# Altium PCB Copy of keybo.PcbDoc
Units mil, origin at the board's own origin, x right, y up, seen from the top; angles counter-clockwise.
Board outline 6000 x 4000 mil, 2 copper layers (Top Layer, Bottom Layer); 77 components, 39 nets, 367 pads, 162 vias.
Unrouted connection lines stored in the file: 3.
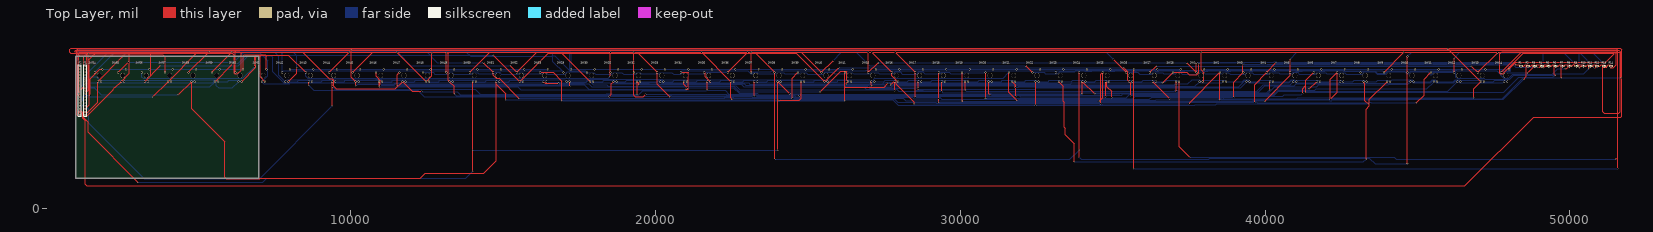
[diagram p0: Top Layer view]
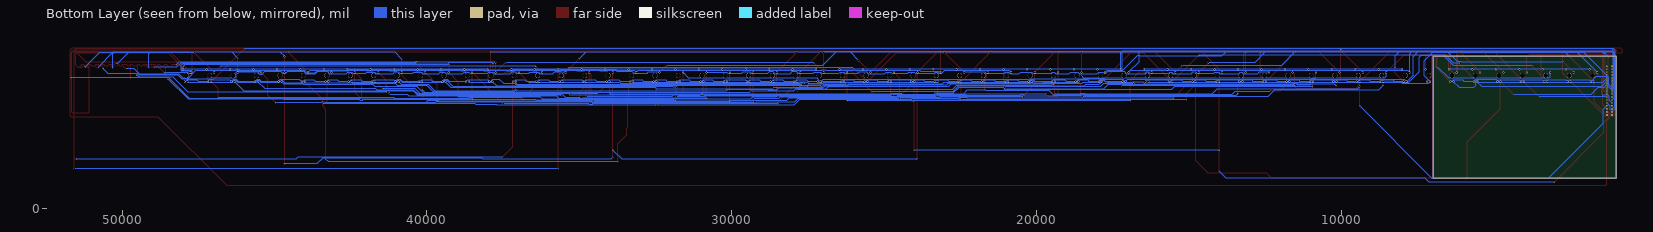
[diagram p1: Bottom Layer view, seen from below]

## Layer stack, top to bottom
Top Solder: solder mask 0.4, Solder Resist, Dk 3.5
Top Layer: signal copper 1.4
Dielectric 1: dielectric 12.6, FR-4, Dk 4.8
Bottom Layer: signal copper 1.4
Bottom Solder: solder mask 0.4, Solder Resist, Dk 3.5

## Board outline
1000,1000 7000,1000 7000,5000 1000,5000

## Design rules (kind name [scope] priority, off if disabled: settings)
Clearance [All] p1: gap=10 ignorepadtopadclearanceinfootprint=FALSE except(0: Arc-Hole Track-Hole SMDPad-Hole THPad-Hole Via-Hole Fill-Hole Poly-Hole Region-Hole Text-Hole)
PolygonConnect [All] p1: connectstyle=Relief reliefconductorwidth=10 reliefentries=4 polygonreliefangle="90 Angle" airgapwidth=10
RoutingVias [All] p1: holewidth=28 width=50 viastyle="Through Hole" minholewidth=28 minwidth=50 maxholewidth=28 maxwidth=50
SolderMaskExpansion [All] p1: expansion=4
Width [All] p1: maxlimit=10 minlimit=10 preferedwidth=10
30 further rules are at their usual default settings.

## Components (designator, comment, footprint, x,y, rotation, side; value= is the part's Value field where it differs from the comment)
P1 "Header 17" HDR1X17 1300,3075 r90 top
P2 "Header 17" HDR1X17 1130,3075 r90 top
R1 "Res" R2012 48395,4680 r0 top
R2 "Res" R2012 48620,4680 r0 top
R3 "Res" R2012 48845,4680 r0 top
R4 "Res" R2012 49075,4680 r0 top
R5 "Res" R2012 49300,4680 r0 top
R6 "Res" R2012 49530,4680 r0 top
R7 "Res" R2012 49755,4680 r0 top
R8 "Res" R2012 49985,4680 r0 top
R9 "Res" R2012 50210,4680 r0 top
R10 "Res" R2012 50440,4680 r0 top
R11 "Res" R2012 50665,4680 r0 top
R12 "Res" R2012 50890,4680 r0 top
R13 "Res" R2012 51120,4680 r0 top
R14 "Res" R2012 51345,4680 r0 top
SW1 "MX_SW" MX_SW-2 37900,4370 r0 top
SW2 "MX_SW" MX_SW-2 38670,4370 r0 top
SW3 "MX_SW" MX_SW-2 39440,4370 r0 top
SW4 "MX_SW" MX_SW-2 40205,4370 r0 top
SW5 "MX_SW" MX_SW-2 40975,4370 r0 top
SW6 "MX_SW" MX_SW-2 41745,4370 r0 top
SW7 "MX_SW" MX_SW-2 42515,4370 r0 top
SW8 "MX_SW" MX_SW-2 43280,4370 r0 top
SW9 "MX_SW" MX_SW-2 44050,4370 r0 top
SW10 "MX_SW" MX_SW-2 44820,4370 r0 top
SW11 "MX_SW" MX_SW-2 45590,4370 r0 top
SW12 "MX_SW" MX_SW-2 46355,4370 r0 top
SW13 "MX_SW" MX_SW-2 47125,4370 r0 top
SW14 "MX_SW" MX_SW-2 47895,4370 r0 top
SW15 "MX_SW" MX_SW-2 27135,4370 r0 top
SW16 "MX_SW" MX_SW-2 27905,4370 r0 top
SW17 "MX_SW" MX_SW-2 28675,4370 r0 top
SW18 "MX_SW" MX_SW-2 29445,4370 r0 top
SW19 "MX_SW" MX_SW-2 30210,4370 r0 top
SW20 "MX_SW" MX_SW-2 30980,4370 r0 top
SW21 "MX_SW" MX_SW-2 31750,4370 r0 top
SW22 "MX_SW" MX_SW-2 32520,4370 r0 top
SW23 "MX_SW" MX_SW-2 33285,4370 r0 top
SW24 "MX_SW" MX_SW-2 34055,4370 r0 top
SW25 "MX_SW" MX_SW-2 34825,4370 r0 top
SW26 "MX_SW" MX_SW-2 35595,4370 r0 top
SW27 "MX_SW" MX_SW-2 36365,4370 r0 top
SW28 "MX_SW" MX_SW-2 37130,4370 r0 top
SW29 "MX_SW" MX_SW-2 17140,4370 r0 top
SW30 "MX_SW" MX_SW-2 17910,4370 r0 top
SW31 "MX_SW" MX_SW-2 18680,4370 r0 top
SW32 "MX_SW" MX_SW-2 19450,4370 r0 top
SW33 "MX_SW" MX_SW-2 20215,4370 r0 top
SW34 "MX_SW" MX_SW-2 20985,4370 r0 top
SW35 "MX_SW" MX_SW-2 21755,4370 r0 top
SW36 "MX_SW" MX_SW-2 22525,4370 r0 top
SW37 "MX_SW" MX_SW-2 23295,4370 r0 top
SW38 "MX_SW" MX_SW-2 24060,4370 r0 top
SW39 "MX_SW" MX_SW-2 24830,4370 r0 top
SW40 "MX_SW" MX_SW-2 25600,4370 r0 top
SW41 "MX_SW" MX_SW-2 26370,4370 r0 top
SW42 "MX_SW" MX_SW-2 7915,4370 r0 top
SW43 "MX_SW" MX_SW-2 8685,4370 r0 top
SW44 "MX_SW" MX_SW-2 9455,4370 r0 top
SW45 "MX_SW" MX_SW-2 10220,4370 r0 top
SW46 "MX_SW" MX_SW-2 10990,4370 r0 top
SW47 "MX_SW" MX_SW-2 11760,4370 r0 top
SW48 "MX_SW" MX_SW-2 12530,4370 r0 top
SW49 "MX_SW" MX_SW-2 13300,4370 r0 top
SW50 "MX_SW" MX_SW-2 14065,4370 r0 top
SW51 "MX_SW" MX_SW-2 14835,4370 r0 top
SW52 "MX_SW" MX_SW-2 15605,4370 r0 top
SW53 "MX_SW" MX_SW-2 16375,4370 r0 top
SW54 "MX_SW" MX_SW-2 1765,4370 r0 top
SW55 "MX_SW" MX_SW-2 2535,4370 r0 top
SW56 "MX_SW" MX_SW-2 3305,4370 r0 top
SW57 "MX_SW" MX_SW-2 4070,4370 r0 top
SW58 "MX_SW" MX_SW-2 4840,4370 r0 top
SW59 "MX_SW" MX_SW-2 5610,4370 r0 top
SW60 "MX_SW" MX_SW-2 6380,4370 r0 top
SW61 "MX_SW" MX_SW-2 7145,4370 r0 top

## Footprints (in the part's own frame and the unit in brackets; to place one, negate y for a bottom-side part, rotate by r counter-clockwise, add the part's x,y. Pads: shape width x height; smd on the part's side, far side on the other; paste and mask are expansions set on the pad)
HDR1X17 [mm] "Connector; Header; 17 Position"
  rect 1.5x1.5 hole 0.9: 1(0,0)
  round 1.5 hole 0.9: 2(2.54,0) 3(5.08,0) 4(7.62,0) 5(10.16,0) 6(12.7,0) 7(15.24,0) 8(17.78,0) 9(20.32,0) 10(22.86,0) 11(25.4,0) 12(27.94,0) 13(30.48,0) 14(33.02,0) 15(35.56,0) 16(38.1,0) 17(40.64,0)
  silkscreen extent -1.27,-1.27 41.91,1.27, body extent -1.27,-1.27 41.91,1.27, height 7.58
MX_SW-2 [mm] "without Fixation pins  1-Pole w/LED"
  round 1.5 hole 0.9: 1(-3.81,2.54) 2(2.54,5.08) 3(-1.27,-5.08) 4(1.27,-5.08)
  round 4.064 hole 4.064: ""(0,0)
R2012 [mm] "Chip Resistor, 2-Leads, Body 2.0x1.2mm, IPC Low Density"
  rect 1x1.4 smd: 1(-1.2,0) 2(1.2,0)
  silkscreen extent -0.3,-0.6 0.3,0.6, body extent -0.98,-0.6 1.02,0.6, height 0.5

## Part data
P1 P2: "Header, 17-Pin", LatestRevisionDate=17-Jul-2002, LatestRevisionNote="Re-released for DXP Platform.", Publisher="Altium Limited"
R1 R2 R3 R4 R5 R6 R7 R8 R9 R10 R11 R12 R13 R14: "贴片电阻"
SW1 SW2 SW3 SW4 SW5 SW6 SW7 SW8 SW9 SW10 SW11 SW12 SW13 SW14 SW15 SW16 SW17 SW18 SW19 SW20 SW21 SW22 SW23 SW24 SW25 SW26 SW27 SW28 SW29 SW30 SW31 SW32 SW33 SW34 SW35 SW36 SW37 SW38 SW39 SW40 SW41 SW42 SW43 SW44 SW45 SW46 SW47 SW48 SW49 SW50 SW51 SW52 SW53 SW54 SW55 SW56 SW57 SW58 SW59 SW60 SW61: library part MX_SW-2, "without Fixation pins  1-Pole w/LED"

## Via types
v1: diameter 50, hole 28, Top Layer to Bottom Layer, 162 vias

## Nets (pads, with @x,y where several pads share a name; then routed paths per layer and width w, separated by ;. In a path a pad name is that pad's centre, name@x,y a point inside that pad or via, vN(x,y) a via of type N, cw(c..) or ccw(c..) an arc to the next point about the centre after c; other vN are vias at no path point)
GND: P1.17
kcol1: P1.1 SW1.3 SW15.3 SW29.3 SW42.3 SW54.3 | length 38917.7
  Top Layer w10: P1.1 1663.72,3438.72 1715,3490 SW54.3 v1(2525,4980) ; SW15.3 27085,4050 v1(27105,4030)
  Bottom Layer w10: v1(2525,4980) 2670,5125 7513,5125 7658,4980 7658,4377 SW42.3 7930,4235 10835.94,4235 10855.47,4254.53 11005,4254.53 11024.53,4235 14082,4235 14085,4238 17022,4238 SW29.3 17157,4237 17751.42,4237 17768.95,4254.53 20249.53,4254.53 20269.06,4235 27020,4235 SW15.3 ; v1(27105,4030) 27495,4030 27539,3986 27746,3986 27787,4027 37038.92,4027 37046.38,4019.53 37699.53,4019.53 SW1.3
kcol2: P1.2 SW2.3 SW16.3 SW30.3 SW55.3 | length 40071.7
  Top Layer w10: P1.2 1255.47,3130.47 1255.47,3030 1345,3030 2216,3901 2216,3920 2272.47,3976.47 2291.47,3976.47 SW55.3 2753,4438 2753,5080 2798,5125 16905,5125 SW30.3 ; v1(27727,4074) 27823,4170 SW16.3 v1(27855,3874)
  Bottom Layer w10: SW30.3 17961,4069 18405,4069 18451,4023 19488,4023 19500,4035 22635,4035 22776,3894 27835,3894 v1(27855,3874) ; v1(27727,4074) 37020.38,4074 37046.38,4100 37470,4100 37607,4237 37860,4237 37896,4201 37896,4139 37910,4125 38575,4125 SW2.3
kcol3: P1.3 SW3.3 SW17.3 SW31.3 SW43.3 SW56.3 | length 43356
  Top Layer w10: P1.3 1435,3410 1435,4900 1660,5125 3405,5125 3450,5080 3450,4365 SW56.3 v1(3769,4684) ; v1(8635,4057) SW43.3 ; v1(18493,3680) 18562,3749 18562,4102 SW31.3 ; v1(28625,3925) SW17.3 v1(28625,3964)
  Bottom Layer w10: v1(3769,4684) 6328,4684 6654,5010 7402,5010 7452,4960 7452,4493.47 7820,4125.47 7988.47,4125.47 8010,4147 8612,4147 SW43.3 ; v1(8635,4057) 8804,3888 12214,3888 12422,3680 v1(18493,3680) ; SW31.3 18675,4125 19808,4125 19832,4149 20069.47,4149 20135,4214.53 20194.47,4214.53 20209,4200 20209,4183 20220,4172 20220,4145.47 20240,4125.47 20903.53,4125.47 20904,4125 23060,4125 23105,4080 26181.29,4080 26218.1,4043.19 27001.81,4043.19 27081,3964 v1(28625,3964) ; v1(28625,3925) 32457,3925 32495,3963 34867,3963 34878,3974 39194,3974 SW3.3
kcol4: P1.4 SW4.3 SW18.3 SW32.3 SW44.3 | length 43729.7
  Top Layer w10: v1(9405,3375) SW44.3 v1(9405,4009) ; v1(19400,3754) SW32.3 19460,4110 v1(19460,4063) ; v1(40155,3906) SW4.3 ; v1(29395,3848) SW18.3 v1(29395,3848)
  Bottom Layer w10: P1.4 1417,3258 1417,2804 3231,990 7020,990 v1(9405,3375) ; v1(9405,4009) 9492,3922 14089,3922 14257,3754 18394.31,3754 18411.57,3771.26 18569.72,3771.26 18586.98,3754 v1(19400,3754) ; v1(19460,4063) 19477,4080 22823,4080 22906,3997 26833,3997 26911,3919 27916,3919 27987,3848 v1(29395,3848) 29433.69,3809.31 34558.69,3809.31 34560,3808 37051.89,3808 37052.89,3807 37131.89,3807 37132.89,3808 40057,3808 v1(40155,3906)
  other v1: 29395,3848
kcol5: P1.5 SW5.3 SW19.3 SW33.3 SW45.3 | length 44503.7
  Top Layer w10: v1(10025,5207) 10025,4315 SW45.3 v1(10170,4027) ; v1(30160,3881) SW19.3 v1(30160,3881)
  Bottom Layer w10: P1.5 1184,3359 1184,3254 1160,3230 1075,3230 1025,3280 1025,5200 1075,5250 9982,5250 v1(10025,5207) ; v1(10170,4027) 10233,4090 11445.67,4090 11468.88,4113.2 11588.88,4113.2 11612.08,4090 16447,4090 16505.34,4148.34 16864.68,4148.34 16888.02,4125 17235,4125 17243,4133 17677,4133 17685,4141 17741.47,4141 17815,4214.53 17893,4214.53 17905,4202.53 17905,4160 17940,4125 18501,4125 18521,4105 20100,4105 SW33.3 20229.53,4105.47 20707.53,4105.47 20710,4103 22916,4103 22970,4049 26174.19,4049 26200,4023.19 26957.81,4023.19 27037,3944 28484,3944 28543,3885 28784,3885 28793,3894 30147,3894 v1(30160,3881) 30194,3847 37012.72,3847 37052.89,3887.17 37132.89,3887.17 37163.05,3857 39723,3857 39933,4067 40822,4067 SW5.3
  other v1: 30160,3881
kcol6: P1.6 SW6.3 SW20.3 SW34.3 SW46.3 | length 32727.5
  Top Layer w10: v1(10940,4006) SW46.3 ; v1(41454,3929) SW6.3 ; 20935,4088 SW34.3 20935,4088 ; 20935,4088 v1(21048,3975) 20935,4088 ; 30930,3776 SW20.3 30930,3776 ; 30930,3776 v1(30970,3736) 30930,3776
  Bottom Layer w10: v1(10940,4006) 15484,4006 15586,3904 20956,3904 20976,3884 21020,3884 21048,3912 v1(21048,3975) 22561.5,3975 22756.5,3780 23335.9,3780 23381.9,3734 24687,3734 24702,3749 24766.81,3749 24781.81,3734 30968,3734 v1(30970,3736) 31962.26,3736 31969.26,3729 35301,3729 35339,3767 40213,3767 40375,3929 v1(41454,3929)
  other v1: 30970,3736 21048,3975
kcol7: P1.7 SW7.3 SW21.3 SW35.3 SW47.3 SW57.3 | length 44476.6
  Top Layer w10: v1(3525,3675) SW57.3 4975,5125 8437,5125 9301,4261 9400,4261 9455,4206 9455,4012 9533,3934 11474,3934 SW47.3 12034,3846 v1(12334,3846) ; v1(31810,3982) 31810,4060 ; v1(31820,3674) 31820,4050 31810,4050 31810,4060 ; 31810,4060 SW21.3 31810,4060 ; v1(21705,3897) SW35.3 v1(21705,3897)
  Bottom Layer w10: P1.7 v1(3525,3675) ; v1(12334,3846) 12338,3842 13501,3842 13609,3734 18414,3734 18422.63,3742.63 18549,3742.63 18577.63,3714 19440,3714 19590,3864 21672,3864 v1(21705,3897) 21724,3878 22292,3878 22410,3760 23295,3760 23357.28,3697.72 24572.11,3697.72 24601.27,3668.56 24766.81,3668.56 24791.25,3693 30876.29,3693 30895.29,3674 v1(31820,3674) ; v1(31810,3982) 31910,3982 31924,3996 34776,3996 34781,4001 37024.92,4001 37026.38,3999.53 39131,3999.53 39346,4214.53 39417.47,4214.53 39445,4187 39445,4140 39460,4125 40354,4125 40368,4139 40792,4139 40798,4145 40810.94,4145 40880.47,4214.53 40954.47,4214.53 40969,4200 40969,4183 40980,4172 40980,4145 41000,4125 42420,4125 SW7.3
  other v1: 21705,3897
kcol8: P1.8 SW8.3 SW22.3 SW36.3 SW48.3 | length 47961.6
  Top Layer w10: P1.8 1407,3882 v1(1407,5077) ; v1(11525,5125) SW48.3 12675,4365 v1(12675,5099) ; v1(21520,5125) SW36.3 22475,3638 v1(22515,3598) ; v1(32470,3391) SW22.3 v1(32470,3398) ; SW8.3 43230,4132 43272,4090 43272,3547 v1(43381,3438)
  Bottom Layer w10: v1(1407,5077) 1455,5125 v1(11525,5125) ; v1(12675,5099) 12701,5125 v1(21520,5125) ; v1(22515,3598) 22520.27,3603.27 24090,3603.27 24117.27,3576 25850.22,3576 25851.51,3577.29 27795.71,3577.29 27975,3398 v1(32470,3398) ; v1(32470,3391) 34547.65,3391 34551.08,3387.57 34667.65,3387.57 34673.08,3393 37693,3393 37714,3414 38388,3414 38412,3438 v1(43381,3438)
kcol9: P1.9 SW9.3 SW23.3 SW37.3 SW49.3 | length 50247.6
  Top Layer w10: P1.9 1345,3920 1345,5080 1390,5125 13160,5125 13205,5080 13205,4215 SW49.3 13402,4018 v1(13402,3764) ; v1(23245,3700) SW37.3 ; SW23.3 33380,4025 33380,3522 33413,3489 33413,2667 33447,2633 33447,2434 33748,2133 v1(33748,1537) ; v1(43310,1620) 43310,3264 43421,3375 43421,3591 SW9.3
  Bottom Layer w10: v1(13402,3764) 13466,3700 18421.35,3700 18443.98,3722.63 18514.78,3722.63 18543.41,3694 20390.87,3694 20421.84,3724.97 20516.87,3724.97 20541.84,3700 v1(23245,3700) ; SW37.3 23290,4125 27000.94,4125 27020.47,4105.47 27460.74,4105.47 27490,4134.74 27550.74,4134.74 27570,4154 27787,4154 27816,4125 33190,4125 SW23.3 ; v1(33748,1537) 43227,1537 v1(43310,1620)
kcol10: P1.10 SW10.3 SW24.3 SW38.3 SW50.3 | length 54105.7
  Top Layer w10: P1.10 1255.47,3930.47 1255.47,3159.53 1235.47,3139.53 1235.47,2995.15 1398,2832.62 1398,2508 v1(3031,875) ; v1(14015,1230) SW50.3 v1(14015,1925) ; v1(24010,1925) SW38.3 v1(24404,3776) ; v1(34005,3769) SW24.3 v1(34406,3769)
  Bottom Layer w10: v1(3031,875) 7125,875 7250,1000 13785,1000 v1(14015,1230) ; v1(14015,1925) v1(24010,1925) ; v1(24404,3776) 24772.81,3776 24786.81,3762 30932,3762 30946,3776 30994,3776 31010,3760 33996,3760 v1(34005,3769) ; v1(34406,3769) 35225,3769 35244,3788 37033,3788 37034,3787 37152.89,3787 37153.89,3788 40103,3788 40310,3995 41700,3995 41767,4062 44046,4062 44060,4076 44676,4076 SW10.3
kcol11: P1.11 SW11.3 SW25.3 SW39.3 SW51.3 SW58.3 | length 52604.8
  Top Layer w10: v1(4353,3733) SW58.3 4790,3280 5877,2193 5877,1033 5920,990 7020,990 7030,1000 12285,1000 12449,1164 14381,1164 14785,1568 SW51.3 14785,4086 15098,3773 v1(15098,3577) ; v1(24050,3563) 24720,3563 24780,3623 SW39.3 24780,3762 v1(24727,3709) ; v1(34775,3679) SW25.3 34808,4137 34808,4005 34965,3848 v1(34965,3645)
  Bottom Layer w10: P1.11 1402,3973 1594,3973 1834,3733 v1(4353,3733) ; v1(15098,3577) 17107,3577 17110,3574 22449,3574 22465,3558 24045,3558 v1(24050,3563) ; v1(24727,3709) 24732,3714 30895,3714 30915,3694 31039,3694 31050,3705 31739,3705 31748,3714 31931,3714 31966,3679 v1(34775,3679) ; v1(34965,3645) 35452,3645 35554,3747 40282,3747 40423.54,3888.54 41625.99,3888.54 41675.45,3938 45308,3938 SW11.3
kcol12: P1.12 SW12.3 SW26.3 SW40.3 SW52.3 SW59.3 | length 47853.6
  Top Layer w10: SW59.3 6105,4715 v1(6105,4772) ; v1(14688,5037) SW52.3 16490,5105 24615,5105 SW40.3 v1(26011,4631) ; v1(35368,4625) 35500,4493 35500,4215 SW26.3 35594,4121 v1(35594,3705)
  Bottom Layer w10: P1.12 1482,3993 5383,3993 SW59.3 ; v1(6105,4772) 6320,4772 6585,5037 v1(14688,5037) ; v1(26011,4631) 31940,4631 31946,4625 v1(35368,4625) ; v1(35594,3705) 35614,3725 40307,3725 40439,3857 45992,3857 SW12.3
kcol13: P1.13 SW13.3 SW27.3 SW60.3 | length 65036
  Top Layer w10: SW27.3 v1(36873,3612) ; v1(45995,5250) 46680.25,4564.75 SW13.3 46847,3942 v1(46847,3644)
  Bottom Layer w10: SW60.3 6131,3971 5676,3971 5607,4040 5607,4187.53 5580,4214.53 5540,4214.53 5515.47,4190 5515.47,4162 5478.47,4125 1450,4125 P1.13 1255.47,4230.47 1255.47,4020.47 1160,3925 1100,3925 1085,3940 1085,5200 1135,5250 v1(45995,5250) ; v1(36873,3612) 36893,3632 38618,3632 38638,3612 41044,3612 41076,3644 v1(46847,3644)
kcol14: P1.14 SW14.3 SW28.3 SW41.3 SW53.3 SW61.3 | length 49796
  Top Layer w10: SW53.3 16387,4108 v1(16825,4108) ; v1(25402,3837) 26080,4515 26258,4515 26275,4498 26275,4215 SW41.3 26260,4110 v1(26260,4084) ; v1(37086,4060) 37080,4066 SW28.3 37080,4052 37093,4039 v1(37093,3847)
  Bottom Layer w10: P1.14 2045,5120 7020,5120 7290,4850 7290,4365 SW61.3 7159.53,4105.47 8010,4105.47 8029.53,4125 11440.67,4125 11448.88,4133.2 11600.67,4133.2 11608.88,4125 16280,4125 SW53.3 ; v1(16825,4108) 16837,4096 17816,4096 17914,3998 21002,3998 21019,4015 22570,4015 22748,3837 v1(25402,3837) ; v1(26260,4084) 27417,4084 27424,4077 27488,4077 27531,4034 27750,4034 27767,4051 37077,4051 v1(37086,4060) ; v1(37093,3847) 37105,3835 39790,3835 39982,4027 40951,4027 41019,4095 42452,4095 42473,4116 44646,4116 44744.53,4214.53 44797.47,4214.53 44820,4192 44820,4145 44840,4125 45428,4125 45517.53,4214.53 45560,4214.53 45590,4184.53 45590,4155 45620,4125 46180,4125 46269.53,4214.53 46332.47,4214.53 46355,4192 46355,4148 46378,4125 47800,4125 SW14.3
krow1: P2.1 SW1.2 SW2.2 SW3.2 SW4.2 SW5.2 SW6.2 SW7.2 SW8.2 SW9.2 SW10.2 SW11.2 SW12.2 SW13.2 SW14.2 | length 192492.4
  Top Layer w10: P2.1 1085,3120 1085,3200 1105,3220 1160,3220 1215.47,3164.53 1215.47,2975.41 1303,2887.88 1303,800 1353,750 46555,750 48805,3000 51663.58,3000 51703.58,3040 51703.58,5206.42 51640,5270 840,5270 800,5230 800,5130 825,5105 6120.47,5105 6185.47,5040 6185.47,4440 6200,4425.47 6293.5,4425.47 6412,4543.97 6412,5093 6360,5145 960,5145 960,5150 1000,5190 51511.08,5190 51556.08,5145 47770,5145 47700.47,5075.47 47700.47,4440 47715,4425.47 47789.53,4425.47 48469.06,5105 51440,5105 51450,5095 51450,5075 51171,4796 48221,4796 SW14.2
  Bottom Layer w10: SW1.2 38385,4570 SW2.2 39155,4570 SW3.2 39922,4570 SW4.2 40690,4570 SW5.2 41460,4570 SW6.2 42230,4570 SW7.2 42997,4570 SW8.2 43765,4570 SW9.2 44535,4570 SW10.2 45305,4570 SW11.2 46072,4570 SW12.2 46840,4570 SW13.2 47610,4570 SW14.2
krow2: P2.2 SW15.2 SW16.2 SW17.2 SW18.2 SW19.2 SW20.2 SW21.2 SW22.2 SW23.2 SW24.2 SW25.2 SW26.2 SW27.2 SW28.2 | length 86038.8
  Top Layer w10: P2.2 1175,3130 1175,3030 1075,3030 1025,3080 1025,5200 1075,5250 51509,5250 51559,5200 v1(51559,1310) ; v1(35695,1310) SW26.2
  Bottom Layer w10: SW15.2 27620,4570 SW16.2 28390,4570 SW17.2 29160,4570 SW18.2 29927,4570 SW19.2 30695,4570 SW20.2 31465,4570 SW21.2 32235,4570 SW22.2 33002,4570 SW23.2 33770,4570 SW24.2 34540,4570 SW25.2 35310,4570 SW26.2 36080,4570 SW27.2 36847,4570 SW28.2 ; v1(35695,1310) v1(51559,1310)
krow3: P2.3 SW29.2 SW30.2 SW31.2 SW32.2 SW33.2 SW34.2 SW35.2 SW36.2 SW37.2 SW38.2 SW39.2 SW40.2 SW41.2 | length 27888.3
  Bottom Layer w10: P2.3 1045,3360 1045,5120 1085,5160 17200,5160 17240,5120 SW29.2 17625,4570 SW30.2 18395,4570 SW31.2 19165,4570 SW32.2 19932,4570 SW33.2 SW34.2 21470,4570 SW35.2 22240,4570 SW36.2 23010,4570 SW37.2 23777,4570 SW38.2 24545,4570 SW39.2 25315,4570 SW40.2 26085,4570 SW41.2
krow4: P2.4 SW42.2 SW43.2 SW44.2 SW45.2 SW46.2 SW47.2 SW48.2 SW49.2 SW50.2 SW51.2 SW52.2 SW53.2 | length 8460
  Bottom Layer w10: SW42.2 8400,4570 SW43.2 9170,4570 SW44.2 9937,4570 SW45.2 10705,4570 SW46.2 11475,4570 SW47.2 12245,4570 SW48.2 13015,4570 SW49.2 13782,4570 SW50.2 14550,4570 SW51.2 15320,4570 SW52.2 16090,4570 SW53.2
krow5: P2.5 SW54.2 SW55.2 SW56.2 SW57.2 SW58.2 SW59.2 SW60.2 SW61.2 | length 7854.8
  Top Layer w10: v1(1475,3723) 1475,4262 1783,4570 SW54.2 ; SW60.2 6480,5005 6520,5045 7200,5045 7245,5000 SW61.2
  Bottom Layer w10: P2.5 1215,3560 1215,3680 1258,3723 v1(1475,3723) ; SW54.2 2250,4570 SW55.2 3020,4570 SW56.2 3787,4570 SW57.2 4555,4570 SW58.2 5325,4570 SW59.2 6095,4570 SW60.2
lcol1: R1.1 SW1.1 SW15.1 SW29.1 SW42.1 SW54.1 | length 50171.7
  Top Layer w10: v1(26985,5125) SW15.1 v1(27305,4790) ; v1(37430,4790) SW1.1 v1(37750,4790) ; v1(48228,4716) 48347.76,4716 R1.1
  Bottom Layer w10: SW54.1 2270,5125 7720,5125 7765,5080 SW42.1 7820,4525 16935,4525 SW29.1 16633,4827 16633,5098 16680,5145 26965,5145 v1(26985,5125) ; v1(27305,4790) v1(37430,4790) ; v1(37750,4790) 37763,4803 40287.06,4803 40305.5,4821.44 40367.06,4821.44 40385.5,4803 48141,4803 v1(48228,4716)
lcol2: R2.1 SW2.1 SW16.1 SW30.1 SW55.1 | length 51378.6
  Top Layer w10: SW55.1 v1(2713,4798) ; v1(27100,5125) SW16.1 27755,4360 27900,4215 27900,4082 28485,3497 v1(28485,3443) ; v1(37493,3443) SW2.1 v1(38520,3572) ; v1(48478,4253) 48572.76,4347.76 R2.1
  Bottom Layer w10: v1(2713,4798) 6065,4798 6079.43,4812.43 6194.43,4812.43 6527,5145 13790,5145 13940,4995 16598,4995 16613,5010 16710,5010 17195,4525 17705,4525 ; v1(27100,5125) 17240,5125 17195,5080 17195,4550 17220,4525 17705,4525 ; v1(28485,3443) 28492,3436 29345.32,3436 29352.32,3443 34553,3443 34588.43,3407.57 34651.08,3407.57 34686.51,3443 v1(37493,3443) ; v1(38520,3572) 42099.35,3572 42124.16,3547.2 42179.35,3547.2 42204.16,3572 44671.5,3572 44688.5,3589 46802,3589 46807,3584 47809,3584 v1(48478,4253) ; 17705,4525 SW30.1 17705,4525
lcol3: R3.1 SW3.1 SW17.1 SW31.1 SW43.1 SW56.1 | length 50614.4
  Top Layer w10: v1(6858,4660) 6858,5000 6898,5040 7965,5040 SW43.1 ; v1(18530,4343) SW31.1 v1(18530,5125) ; v1(27870,5125) SW17.1 v1(28525,3650) ; v1(38972,3652) 38972,4152 SW3.1 39268,4492 v1(39268,4720) ; v1(48616,4465) 48797.76,4646.76 R3.1
  Bottom Layer w10: SW56.1 3155,4320 3200,4275 6473,4275 v1(6858,4660) ; SW43.1 8535,4340 8600,4275 18462,4275 v1(18530,4343) ; v1(18530,5125) v1(27870,5125) ; v1(28525,3650) 29335,3650 29395,3590 31809,3590 31820,3601 31889,3601 31900,3590 34465.62,3590 34480,3604.38 34640,3604.38 34659.38,3585 36208,3585 36275,3652 v1(38972,3652) ; v1(39268,4720) 47934.53,4720 48039.53,4615 48039.53,4538.53 48022,4521 47720,4521 47700,4501 47700,4445 47720,4425 47800,4425 47840,4465 v1(48616,4465)
lcol4: R4.1 SW4.1 SW18.1 SW32.1 SW44.1 | length 44342.3
  Top Layer w10: SW44.1 v1(9960,5125) ; v1(19300,5125) SW32.1 19300,3720 19343,3677 19609,3677 v1(19681,3749) ; v1(29295,3610) SW18.1 29295,3500 v1(29299,3496) ; v1(39657,3488) 39657,4072 SW4.1 40055,4500 40064,4500 v1(40345,4781) ; v1(48947,4640) 49017.76,4640 49027.76,4650 R4.1
  Bottom Layer w10: v1(9960,5125) v1(19300,5125) ; v1(19681,3749) 22325,3749 22334,3740 23285,3740 23347.28,3677.72 24556.83,3677.72 24585.99,3648.56 24786.81,3648.56 24801.25,3663 28430,3663 28483,3610 v1(29295,3610) ; v1(29299,3496) 29307,3488 34520,3488 34524,3484 34571.08,3484 34575.08,3488 v1(39657,3488) ; v1(40345,4781) 40348,4778 48078,4778 48216,4640 v1(48947,4640)
lcol5: R5.1 SW5.1 SW19.1 SW33.1 SW45.1 | length 43741
  Top Layer w10: SW45.1 10725,5125 19410,5125 SW33.1 20065,4081 v1(20477,3669) ; v1(30060,3532) SW19.1 v1(30060,3539) ; v1(39982,3532) 40825,4375 SW5.1 v1(40825,4907) ; v1(49129,4617) 49184,4672 49252.76,4672 R5.1
  Bottom Layer w10: v1(20477,3669) 23163,3669 23174.28,3657.72 24536.83,3657.72 24567.55,3627 28130,3627 28218,3539 v1(30060,3539) ; v1(30060,3532) 30071,3521 31900,3521 31911,3532 34487.62,3532 34520,3564.38 34600,3564.38 34632.38,3532 39597,3532 39613,3548 39966,3548 v1(39982,3532) ; v1(40825,4907) 41043,5125 49084,5125 49129,5080 v1(49129,4617)
lcol6: R6.1 SW6.1 SW20.1 SW34.1 SW46.1 | length 43538.4
  Top Layer w10: SW46.1 10840,4344 10985,4199 v1(10985,4049) ; SW34.1 21080,4470 21088,4462 21088,3936 21076,3924 v1(20996,3924) ; v1(30830,3630) SW20.1 ; v1(41230,3780) 41230,3941 41339,4050 41339,4214 ; v1(41339,3816) 41339,4214 ; R6.1 49482.76,4407.24 v1(49509,4381) ; 41339,4214 SW6.1 41339,4214
  Bottom Layer w10: v1(10985,4049) 11444.67,4049 11488.88,4093.2 11568.88,4093.2 11593.08,4069 16785,4069 16786,4068 17668,4068 17812,3924 v1(20996,3924) ; SW34.1 20890,4525 23027,4525 23132,4420 23188,4420 23233,4465 23350,4465 23390,4425 23955,4425 23995,4465 24207,4465 24247,4425 24725,4425 24765,4465 24951,4465 25001,4415 25504,4415 25560,4471 25834,4471 25880,4425 26265,4425 26305,4465 26465,4465 26505,4425 27029.53,4425 27069.53,4465 27305,4465 27345,4425 27806.55,4425 27866.55,4485 28029,4485 28099,4415 28569.53,4415 28639.53,4485 28773,4485 28833,4425 29339.53,4425 29386.53,4472 29642,4472 29689,4425 30104.53,4425 30144.53,4465 30794.53,4465 30799.53,4470 SW20.1 ; v1(30830,3630) 34900,3630 34925,3605 35664,3605 35748,3689 38929,3689 38932,3692 40578,3692 40621,3735 41185,3735 v1(41230,3780) ; v1(41339,3816) 47827,3816 48324,4313 49441,4313 v1(49509,4381)
lcol7: P2.8 R7.1 SW7.1 SW21.1 SW29.4 SW30.4 SW31.4 SW32.4 SW33.4 SW34.4 SW35.1 SW35.4 SW36.4 SW37.4 SW38.4 SW39.4 SW40.4 SW41.4 SW47.1 SW57.1 | length 103072.8
  Top Layer w10: SW57.1 3920,4980 3843,5057 1142,5057 1085,5000 1085,3820 ; v1(11529,4053) 11529,4389 SW47.1 ; v1(17190,4011) SW29.4 ; SW35.1 21644,4431 21644,4331 SW35.4 ; SW21.1 31600,3821 v1(31860,3561) ; v1(51684,4293) 51684,5080 51640,5124 1135,5124 1085,5074 1085,3820 ; 1085,3820 P2.8 1085,3820 ; v1@49707.76,4293.76 v1(49707,4293) v1@49707.76,4293.76 ; v1@49707.76,4293.76 R7.1 v1@49707.76,4293.76 ; v1(42139,3592) 42365,3818 SW7.1 42139,4244 v1(42139,3592)
  Bottom Layer w10: v1(11529,4053) 11544,4038 17163,4038 v1(17190,4011) ; SW29.4 17730.94,4170 17795.47,4234.53 17913.04,4234.53 17927.57,4220 17927.57,4202.43 SW30.4 18272,4170 18317,4215 18658,4215 18703,4170 SW31.4 19020,4170 19065,4215 19455,4215 SW32.4 20055.47,4170 20120,4234.53 20215,4234.53 20229.53,4220 20229.53,4205.47 SW33.4 20577,4170 20622,4215 20963,4215 21008,4170 SW34.4 21348,4170 21393,4215 21732,4215 21777,4170 SW35.4 22117,4170 22162,4215 22503,4215 22548,4170 SW36.4 22865,4170 22910,4215 23300,4215 SW37.4 23655,4170 23700,4215 24037,4215 24082,4170 SW38.4 24155,4215 24835,4215 SW39.4 25192,4170 25237,4215 25578,4215 25623,4170 SW40.4 25962,4170 26007,4215 26348,4215 26393,4170 SW41.4 27020,4170 27064.53,4125.47 27115,4125.47 27129.53,4140 27129.53,4203.53 27200,4274 31404,4274 SW21.1 ; v1(31860,3561) 34480,3561 34503.38,3584.38 34616.62,3584.38 34640,3561 36417,3561 36428,3572 38460,3572 38500,3612 38544,3612 38560,3596 38614,3596 38618,3592 v1(42139,3592) 42155,3608 44660,3608 44669,3617 46814,3617 46827,3604 47771,3604 48460,4293 v1(49707,4293) v1(51684,4293)
  other v1: 42139,3592 49707,4293
lcol8: R8.1 SW8.1 SW22.1 SW36.1 SW48.1 | length 39240
  Top Layer w10: SW36.1 v1(23030,5125) ; v1(32148,4692) SW22.1 ; v1(49851,4586) 49883.76,4586 49937.76,4640 R8.1
  Bottom Layer w10: SW48.1 12712,4470 12765,4417 13204,4417 13252,4465 13348,4465 13395,4418 13969,4418 14017,4466 14169,4466 14210,4425 14730,4425 14775,4470 14902,4470 14954,4418 15509,4418 15556,4465 15660,4465 15700,4425 16270,4425 16325,4480 16410,4480 16473,4417 17044,4417 17120,4493 17671,4493 17744,4420 17776,4420 17821,4465 17987,4465 18048,4404 18579,4404 18640,4465 18897,4465 18958,4404 19339,4404 19400,4465 19505,4465 19545,4425 20110,4425 20150,4465 20544,4465 20606,4403 20840,4403 20902,4465 21040,4465 21080,4425 21650,4425 21695,4470 SW36.1 ; v1(23030,5125) 26595,5125 27028,4692 v1(32148,4692) ; SW22.1 32752,4470 32797,4425 33189,4425 33257,4493 33754.5,4493 33786.5,4525 34070.94,4525 34090.47,4505.47 34319.47,4505.47 34339,4525 34840.94,4525 34860.47,4505.47 35064.47,4505.47 35084,4525 35610.94,4525 35630.47,4505.47 35767.34,4505.47 35781.87,4520 36385.94,4520 36400.47,4505.47 36515,4505.47 36529.53,4520 37150.94,4520 37165.47,4505.47 37364.47,4505.47 37378.99,4520 37920.94,4520 37935.47,4505.47 38120.47,4505.47 38135,4520 38698.21,4520 38712.74,4505.47 38865.47,4505.47 38880,4520 39460.94,4520 39475.47,4505.47 39590,4505.47 39604.53,4520 40225.94,4520 40240.47,4505.47 40355,4505.47 40369.53,4520 40995.94,4520 41010.47,4505.47 41217.97,4505.47 41232.5,4520 41765.94,4520 41780.47,4505.47 41962.97,4505.47 41977.5,4520 42540.79,4520 42555.32,4505.47 43094.53,4505.47 SW8.1 43165.47,4505.47 43616.53,4505.47 43677,4445 43856,4445 43875.53,4425.47 43920.47,4425.47 44013,4518 46140.47,4518 46157,4534.53 46269.53,4534.53 46286.06,4518 47590,4518 47833,4275 47990,4275 48124,4409 49414.03,4409 49591.03,4586 v1(49851,4586)
lcol9: R9.1 SW9.1 SW23.1 SW37.1 SW49.1 | length 39098
  Top Layer w10: SW49.1 v1(13150,5113) ; SW37.1 v1(23145,5125) ; SW9.1 v1(44555,5125) ; R9.1 50162.76,4726.76 v1(50172,4736)
  Bottom Layer w10: v1(13150,5113) 13162,5125 v1(23145,5125) ; SW37.1 23180,4470 23195,4485 23783,4485 23818,4520 26905.94,4520 26920.47,4534.53 27045,4534.53 27059.53,4520 33085,4520 SW23.1 33190,4525 33748,4525 33771,4548 34111,4548 34133.53,4525.47 34179.47,4525.47 34199,4545 34881,4545 34900.53,4525.47 34950.47,4525.47 34970,4545 35651,4545 35670.53,4525.47 35740,4525.47 35759.53,4545 36420,4545 36439.53,4525.47 36493.47,4525.47 36510,4542 37185,4542 37201.53,4525.47 37275,4525.47 37289.53,4540 37955,4540 37969.53,4525.47 38045,4525.47 38064.53,4545 38720,4545 38739.53,4525.47 38797.47,4525.47 38815,4543 39495,4543 39512.53,4525.47 39567.47,4525.47 39585,4543 40260,4543 40277.53,4525.47 40333.47,4525.47 40350,4542 41030,4542 41046.53,4525.47 41120,4525.47 41134.53,4540 41800,4540 41814.53,4525.47 41890,4525.47 41909.53,4545 42575,4545 42594.53,4525.47 43552.97,4525.47 43554.5,4527 43843,4527 SW9.1 ; v1(44555,5125) 49783,5125 v1(50172,4736)
lcol10: R10.1 SW10.1 SW24.1 SW38.1 SW50.1 | length 49539.1
  Top Layer w10: SW50.1 14570,5125 23255,5125 SW38.1 v1(23910,1620) ; v1(33905,1688) SW24.1 v1(33905,1926) ; v1(44670,1470) SW10.1 v1(44670,4993) ; v1(50301,4617) 50356,4672 50392.76,4672 R10.1
  Bottom Layer w10: v1(23910,1620) 33599,1620 v1(33905,1926) ; v1(33905,1688) 33973,1620 38150,1620 38179,1649 43238,1649 43252,1663 43424,1663 43617,1470 v1(44670,1470) ; v1(44670,4993) 44802,5125 50256,5125 50301,5080 v1(50301,4617)
lcol11: R11.1 SW11.1 SW25.1 SW39.1 SW51.1 SW58.1 | length 52170.1
  Top Layer w10: SW58.1 v1(5365,5145) ; v1(14365,4790) SW51.1 14685,4375 14785,4275 14880,4275 v1(15526,3629) ; v1(34554,3524) 34675,3645 34675,4406 SW25.1 34611,4406 v1(34611,3448) ; v1(44955,3469) 45212,3726 45212,4242 SW11.1 ; v1(50617.76,4588) R11.1 ; 24497,4287 SW39.1 24497,4287 ; 24497,4287 v1(24497,3617) 24497,4287
  Bottom Layer w10: v1(5365,5145) 12498,5145 12853,4790 v1(14365,4790) ; v1(15526,3629) 22274,3629 22284,3639 22551,3639 22566,3624 24490,3624 v1(24497,3617) 24512,3602 27841,3602 27956,3487 29195,3487 29226,3456 29325,3456 29333,3464 34595,3464 v1(34611,3448) ; v1(34554,3524) 34568,3510 39617,3510 39635,3528 39678,3528 39737,3469 43341.48,3469 43362.23,3489.75 43461.48,3489.75 43482.23,3469 v1(44955,3469) ; SW11.1 45464,4494 46157,4494 46177.53,4514.53 46227.47,4514.53 46260,4482 46260,4320 46307,4273 47183,4273 47210,4246 48019,4246 48152,4379 49448,4379 49490,4421 50450.76,4421 v1(50617.76,4588)
  other v1: 24497,3617
lcol12: R12.1 SW12.1 SW26.1 SW40.1 SW52.1 SW59.1 | length 48404.4
  Top Layer w10: SW59.1 v1(6115,5125) ; v1(15235,4690) SW52.1 16110,5125 24795,5125 SW40.1 v1(25837,4857) ; v1(35019,4896) SW26.1 ; SW12.1 v1(46205,4938) ; v1(50803,4624) 50820,4624 50842.76,4646.76 R12.1
  Bottom Layer w10: v1(6115,5125) 11545,5125 11980,4690 v1(15235,4690) ; v1(25837,4857) 26105,5125 34790,5125 v1(35019,4896) ; SW26.1 35830,4470 35882,4418 36270,4418 36317,4465 36639,4465 36679,4425 37034,4425 37084,4475 37224,4475 37284,4415 37780,4415 37830,4465 37995,4465 38035,4425 38565,4425 38605,4465 38799,4465 38849,4415 39345,4415 39395,4465 39583,4465 39633,4415 40110,4415 40160,4465 40448,4465 40488,4425 40879,4425 40929,4475 41066,4475 41126,4415 41650,4415 41700,4465 41982,4465 42022,4425 42410,4425 42450,4465 42608,4465 42658,4415 43184,4415 43254.47,4485.47 43596.53,4485.47 43676.53,4405.47 43934.47,4405.47 44022,4493 44579,4493 44652,4420 44708,4420 44775,4487 45333,4487 45420,4400 45460,4400 45530,4470 SW12.1 ; v1(46205,4938) 46392,5125 50302,5125 v1(50803,4624)
lcol13: R13.1 SW13.1 SW27.1 SW60.1 | length 66059.5
  Top Layer w10: SW60.1 6230,5160 6270,5200 51604,5200 51644,5160 51644,3182 51600,3138 51120,3138 51072.76,3185.24 R13.1 51072.76,4650 51085.76,4637 v1(51224,4637) ; SW27.1 v1(36425,4680) ; v1(46765,4680) SW13.1 v1(47627,5122)
  Bottom Layer w10: v1(36425,4680) v1(46765,4680) ; v1(47627,5122) 50739,5122 v1(51224,4637)
lcol14: R14.1 SW14.1 SW28.1 SW41.1 SW53.1 SW61.1 | length 39853.4
  Top Layer w10: SW53.1 16648,4470 16939,4179 v1(16939,3537) ; v1(26220,3537) SW41.1 26220,4004 26234,3990 27505.26,3990 v1(27629.26,4114) ; v1(36635,4125) SW28.1 37438,4470 37507,4401 37760,4401 37822,4463 v1(37822,4752) ; SW14.1 48400,5125 51472,5125 51517,5080 51517,4728 51418,4629 51320,4629 51297.76,4651.24 R14.1
  Bottom Layer w10: v1(16939,3537) 23996,3537 24010,3523 24076,3523 24090,3537 v1(26220,3537) ; v1(27629.26,4114) 27767,4114 27780,4101 33630,4101 33654,4125 v1(36635,4125) ; v1(37822,4752) 37852.45,4782.45 39277.25,4782.45 39318.7,4741 40374,4741 40385,4752 44411.12,4752 44420.45,4742.67 48023.33,4742.67 48059.53,4706.47 48059.53,4520 48040.44,4500.91 47775.91,4500.91 SW14.1
lrow1: P2.6 SW1.4 SW2.4 SW3.4 SW4.4 SW5.4 SW6.4 SW7.4 SW8.4 SW9.4 SW10.4 SW11.4 SW12.4 SW13.4 SW14.4 | length 50032.7
  Top Layer w10: v1(37900,5125) 37900,4560 37995,4465 37995,4215 SW1.4
  Bottom Layer w10: P2.6 1065,3640 1065,5080 1110,5125 v1(37900,5125) ; SW1.4 37995,4215 38675,4215 SW2.4 39252.93,4170 39317.45,4234.53 39440,4234.53 39463.72,4210.8 39463.72,4196.28 SW3.4 39800,4170 39845,4215 40182,4215 40227,4170 SW4.4 40795.94,4170 40860.47,4234.53 40980,4234.53 41000.47,4214.06 41000.47,4194.53 SW5.4 41070,4215 41750,4215 SW6.4 42108,4170 42153,4215 42492,4215 42537,4170 SW7.4 42875,4170 42920,4215 43257,4215 43302,4170 SW8.4 43642,4170 43687,4215 44028,4215 44073,4170 SW9.4 44164.53,4234.53 44820,4234.53 44843.72,4210.8 44843.72,4196.28 SW10.4 45412.83,4170 45477.36,4234.53 45575.47,4234.53 SW11.4 46168.77,4170 46233.29,4234.53 46360.47,4234.53 46375,4220 46375,4200 SW12.4 46450,4215 46992.39,4215 47011.92,4234.53 47140,4234.53 47150.47,4224.06 47150.47,4194.53 SW13.4 47487,4170 47532,4215 47873,4215 47918,4170 SW14.4
lrow2: P2.7 SW15.4 SW16.4 SW17.4 SW18.4 SW19.4 SW20.4 SW21.4 SW22.4 SW23.4 SW24.4 SW25.4 SW26.4 SW27.4 SW28.4 | length 82856.5
  Top Layer w10: P2.7 1045,3760 1045,5220 1075,5250 51509,5250 51559,5200 51559,1675 v1(51504,1620) ; SW28.4 37180,2038 v1(37530,1688)
  Bottom Layer w10: SW15.4 27498,4170 27543,4215 27882,4215 27927,4170 SW16.4 28267,4170 28312,4215 28653,4215 28698,4170 SW17.4 29038,4170 29083,4215 29422,4215 29467,4170 SW18.4 29540,4215 30215,4215 SW19.4 30572,4170 30617,4215 30958,4215 31003,4170 SW20.4 31342,4170 31387,4215 31728,4215 31773,4170 SW21.4 32112,4170 32157,4215 32498,4215 32543,4170 SW22.4 32880,4170 32925,4215 33262,4215 33307,4170 SW23.4 33647,4170 33692,4215 34033,4215 34078,4170 SW24.4 34418,4170 34463,4215 34802,4215 34847,4170 SW25.4 34875,4200 34890,4215 35600,4215 SW26.4 35957,4170 36002,4215 36343,4215 36388,4170 SW27.4 36725,4170 36770,4215 37107,4215 37152,4170 SW28.4 ; v1(37530,1688) 44237,1688 44305,1620 v1(51504,1620)
lrow4: P2.9 SW42.4 SW43.4 SW44.4 SW45.4 SW46.4 SW47.4 SW48.4 SW49.4 SW50.4 SW51.4 SW52.4 SW53.4 | length 18080.9
  Top Layer w10: P2.9 1251,3996 v1(1251,4987) ; SW42.4 8237,4442 v1(8237,4621)
  Bottom Layer w10: v1(1251,4987) 1389,5125 8131,5125 8237,5019 v1(8237,4621) ; SW42.4 8255,4170 8300,4215 8690,4215 SW43.4 9048,4170 9093,4215 9432,4215 9477,4170 SW44.4 9792,4170 9837,4215 10225,4215 SW45.4 10315,4215 10995,4215 SW46.4 11352,4170 11397,4215 11738,4215 11783,4170 SW47.4 12100,4170 12145,4215 12535,4215 SW48.4 12892,4170 12937,4215 13278,4215 13323,4170 SW49.4 13395,4215 14070,4215 SW50.4 14428,4170 14473,4215 14812,4215 14857,4170 SW51.4 15197,4170 15242,4215 15583,4215 15628,4170 SW52.4 15700,4215 16380,4215 SW53.4
lrow5: P2.10 SW54.4 SW55.4 SW56.4 SW57.4 SW58.4 SW59.4 SW60.4 SW61.4 | length 7944.2
  Top Layer w10: SW60.4 6899,4639 6899,4960 6949,5010 7020,5010 7040,4990 7040,4325 SW61.4
  Bottom Layer w10: P2.10 1235.47,4080.47 1235.47,4302.47 1255,4322 1663,4322 SW54.4 1861.56,4216.56 2538.44,4216.56 SW55.4 2630,4215 3310,4215 SW56.4 3401.84,4216.84 4073.16,4216.84 SW57.4 4165,4215 4845,4215 SW58.4 4890,4215 4909.53,4234.53 5595.47,4234.53 SW59.4 5973,4170 6018,4215 6357,4215 6402,4170 SW60.4
VCC: R1.2 R2.2 R3.2 R4.2 R5.2 R6.2 R7.2 R8.2 R9.2 R10.2 R11.2 R12.2 R13.2 R14.2 | length 3544.6
  Top Layer w10: R1.2 48486,4680 48529,4723 48599,4723 48642,4680 R2.2 48711,4680 48754,4723 48824,4723 48867,4680 R3.2 48892.24,4710 48909.24,4727 49075.24,4727 R4.2 49165.24,4723 49304.24,4723 R5.2 49391,4680 49438,4727 49506,4727 49553,4680 R6.2 49619,4680 49666,4727 49731,4727 49778,4680 R7.2 49845.24,4723 49989.24,4723 R8.2 50052,4680 50148,4776 50212,4776 50257.24,4730.76 R9.2 50304.24,4727 50440.24,4727 R10.2 50529,4680 50576,4727 50641,4727 50688,4680 R11.2 50756,4680 50759.84,4683.84 50759.84,4718.62 50764.22,4723 50869,4723 50912,4680 R12.2 50983,4680 51026,4723 51099,4723 51142,4680 R13.2 51209,4680 51256,4727 51321,4727 51368,4680 R14.2
pads on no net: P1.15 P1.16 P2.11 P2.12 P2.13 P2.14 P2.15 P2.16 P2.17 SW1. SW2. SW3. SW4. SW5. SW6. SW7. SW8. SW9. SW10. SW11. SW12. SW13. SW14. SW15. SW16. SW17. SW18. SW19. SW20. SW21. SW22. SW23. SW24. SW25. SW26. SW27. SW28. SW29. SW30. SW31. SW32. SW33. SW34. SW35. SW36. SW37. SW38. SW39. SW40. SW41. SW42. SW43. SW44. SW45. SW46. SW47. SW48. SW49. SW50. SW51. SW52. SW53. SW54. SW55. SW56. SW57. SW58. SW59. SW60. SW61.

## Keep-outs
Keep-Out Layer:
  the board outline again, w10